# Altium PCB PMP30528_RevA.PcbDoc (part 3 of 3)
Units mil, origin at the board's own origin, x right, y up, seen from the top; angles counter-clockwise.
Board outline 2735.03 x 1328.78 mil, 2 copper layers (Top Layer, Bottom Layer), stack 62 mil thick; 91 components, 42 nets, 252 pads, 63 vias.
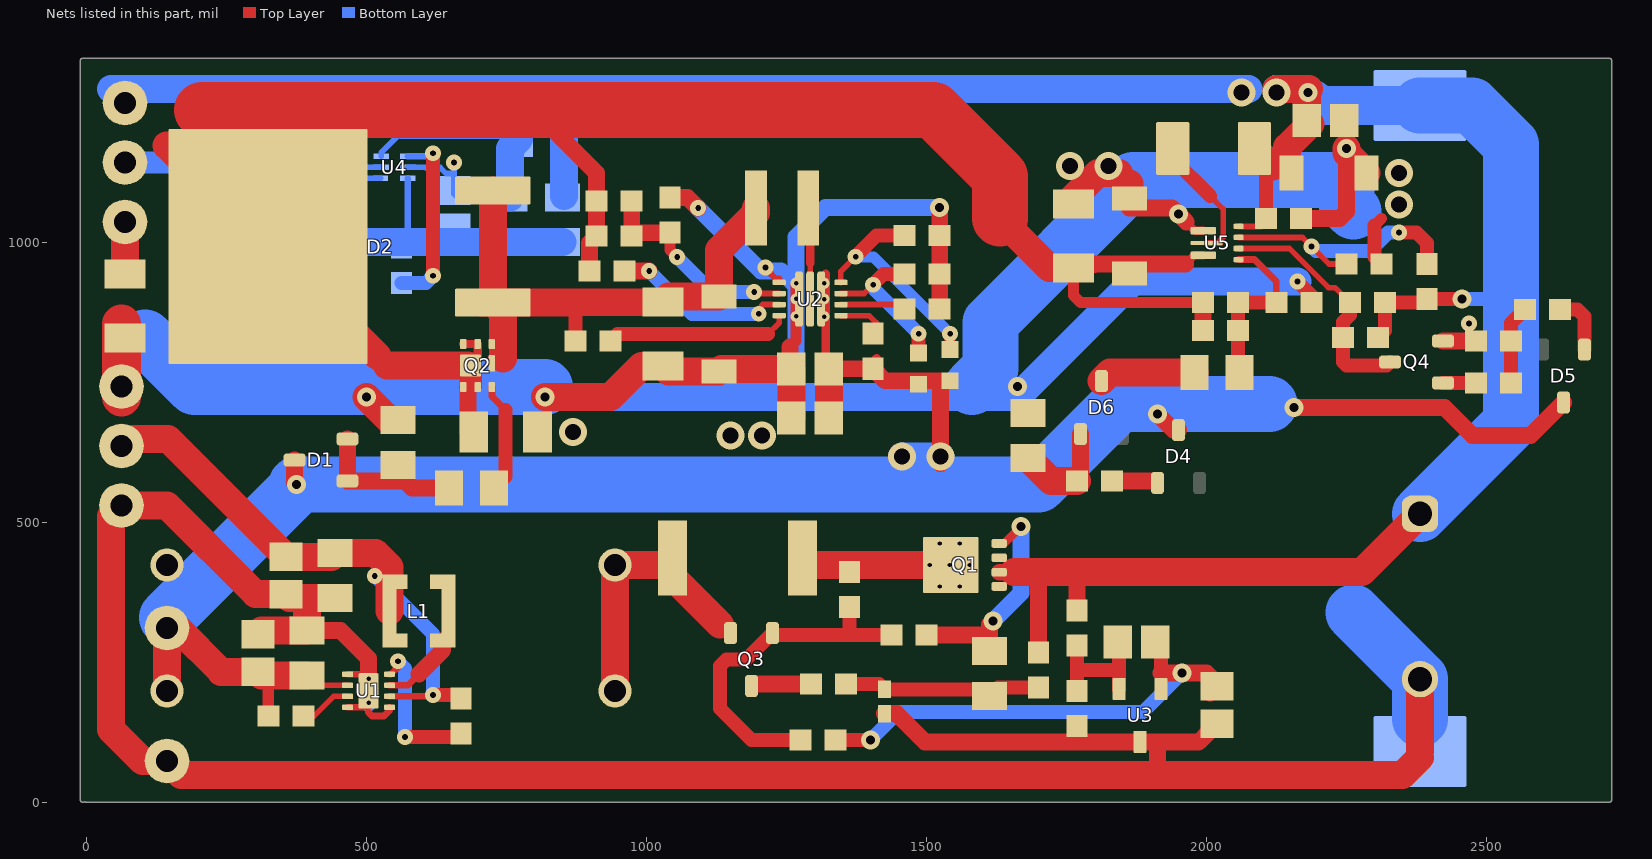
[diagram p2: the nets of this part, all layers, seen from the top]

## Via types
v1: diameter 28, hole 10, Top Layer to Bottom Layer, 21 vias
v2: diameter 34, hole 16, Top Layer to Bottom Layer, 16 vias
v3: diameter 50, hole 28, Top Layer to Bottom Layer, 11 vias
v4: diameter 19.68, hole 7.87, Top Layer to Bottom Layer, 9 vias
v5: diameter 20, hole 8, Top Layer to Bottom Layer, 6 vias

## Nets (pads, with @x,y where several pads share a name; then routed paths per layer and width w, separated by ;. In a path a pad name is that pad's centre, name@x,y a point inside that pad or via, vN(x,y) a via of type N, cw(c..) or ccw(c..) an arc to the next point about the centre after c; other vN are vias at no path point)
3.3Vout: C5.1 C12.1 C13.1 C23.1 C24.1 C25.1 D2.4 Q2.1 Q2.2 Q2.5 Q2.6 Q2.8 R14.2 R18.2 R34.2 TP6.1 U5.3@1994.14,978.35 | length 3830.9
  Top Layer w15: Q2.1@672.75,742.8 681.41,742.8 ; Q2.6@672.75,819.57 Q2.5@698.34,819.57 Q2.2@698.34,742.8 ; 1962.5,962.5 1978.35,978.35 U5.3@1994.14,978.35
  Top Layer w20: C25.1@1762.5,955.41 1762.5,906.25 1775,893.75 R34.2@1993.5,893.75
  Top Layer w30: 525.74,1234.79 843.75,1234.79 ; C12.1@681.41,662.43 681.41,742.8 Q2.8@681.41,781.18 ; 842.09,1193.68 910.59,1125.18 R18.2@910.59,1074.93 C5.1@910.59,1012.43 ; R14.2@898.09,949.93 C5.1@898.09,999.93 ; 1800,961.66 1800.84,962.5 1962.5,962.5 ; C23.1@1993.5,843.75 R34.2@1993.5,893.75
  Top Layer w50: C13.1@68.75,944.59 TP6.1@68.75,1037.5 ; 143.25,1174.5 D2.4@324.07,993.68 519.65,798.11 ; 536.57,781.18 Q2.8@681.41,781.18 ; 1631.25,1043.75 1719.59,955.41 C25.1@1762.5,955.41
  Top Layer w100: 206.25,1237.5 1512.5,1237.5 1631.25,1118.75 1631.25,1043.75
EN_U3: Q4.3 R29.1 R32.2 U5.5 | length 439.5
  Top Layer w10: U5.5@2057.14,990.16 2147.93,990.16 2217.79,920.3 2229.45,920.3 R32.2@2256,893.75
  Top Layer w25: R32.2@2256,893.75 2256,871.21 2243.5,858.71 R29.1@2243.5,831.25 2243.5,787.75 2250,781.25 2321.51,781.25 Q4.3@2327.76,787.5
FB1: C5.2 R18.1 R23.2 U2.5 | length 391.5
  Top Layer w10: v1@1194.74,909.77 U2.5@1236.97,909.77
  Top Layer w12: v1(1192.09,912.43) v1@1194.74,909.77
  Top Layer w20: R23.2@1042.09,1018.44 1042.09,987.43 v1(1054.59,974.93)
  Top Layer w30: R18.1@973.58,1074.93 C5.2@973.58,1012.43 979.59,1018.44 R23.2@1042.09,1018.44
  Bottom Layer w25: v1(1054.59,974.93) 1117.09,912.43 v1(1192.09,912.43)
GND: BT1.1 C1.2 C2.2 C3.2 C4.2 C7.2 C8.2 C9.2 C10.2 C11.2 C12.2 C13.2 C14.2 C15.2 C16.2 C17.2 C18.2 C19.2 C20.2 C21.2 C22.2 C24.2 C25.2 D3.2 Q4.2 R7.1 R21.1 R22.1 R23.1 R24.1 R27.1 R28.2 R36.1 R37.1 R38.1 TP3.1 TP4.1 TP7.1 U1.1 U1.4 U1.5 U1.9@503.75,200.32 U2.3@1272.4,899.93 U2.4 U3.3 U4.6 U5.1@1994.14,1021.65 | length 11186.3
  Top Layer w12: U1.4@466.35,170.79 U1.9@503.28,170.79 ; U1.1@466.35,229.84 495.88,229.84 v4(503.75,221.97) ; 503.28,161.95 509.91,155.32 531.25,155.32 541.15,165.22 U1.5@541.15,170.79 ; v1@1217.09,949.93 1230.87,936.15 1236.97,936.15 ; 1256.46,814.3 1267.09,824.93
  Top Layer w15: 1963.91,1037.5 1979.75,1021.65 U5.1@1994.14,1021.65
  Top Layer w20: 1267.09,824.93 U2.3@1267.09,924.93 ; 2300,1031.25 2312.5,1043.75
  Top Layer w25: v1(2162.5,931.25) 2187.75,906 R38.1@2187.75,893.75 ; 2300,1031.25 2300,975.25 R37.1@2312.75,962.5
  Top Layer w30: C4.2@393.75,307.82 453.75,307.82 503.75,257.82 v4(503.75,221.97) ; R23.1@1042.09,1081.43 1073.09,1081.43 v1(1092.09,1062.43) ; 1256.46,814.3 1256.46,777.1 C8.2@1258.62,774.93 ; D3.2@1425,159.6 1446.65,159.6 1497.24,109.01 U3.3@1881.25,109.01 1912.5,109.01 ; v2(1523.34,1063.17) 1523.58,1062.92 C15.2@1523.58,881.92 ; C24.2@1862.5,1062.5 1938.91,1062.5 1963.91,1037.5 ; 1912.5,50 1912.5,109.01 ; C14.2@2006.25,129.04 1986.22,109.01 1912.5,109.01 ; C22.2@2169,1043.75 2237.5,1043.75 2250,1056.25 v2@2250,1160.68 ; v2(2250,1168.75) 2250,1210.29 C19.2@2252.21,1212.5 ; Q4.2@2422.24,824.9 R36.1@2480.91,824.9
  Top Layer w50: C3.2@312.79,307.82 C4.2@393.75,307.82 393.75,364.38 ; C2.2@356.25,372.79 302.21,372.79 143.75,531.25 TP4.1@62.5,531.25 43.75,512.5 43.75,131.25 100,75 TP3.1@143.75,75 168.75,50 1912.5,50 2350,50 2381.25,81.25 ; C2.2@362.79,366.25 C1.2@443.75,366.25 ; v2(500,725) 541.25,683.75 R7.1@556.25,683.75 ; v2(818.75,725) 935.91,725 991.25,780.34 C10.2@1029.59,780.34 ; C10.2@1039.43,770.5 C9.2@1129.59,770.5 1134.02,774.93 C8.2@1258.62,774.93 C7.2@1258.62,687.43 ; C25.2@1762.5,1069.59 1762.5,1081.25 1806.25,1125 v3@1843.75,1125 ; C24.2@1862.5,1079.43 1862.5,1106.25 ; v2(2250,1168.75) 2250,1160.68 C20.2@2285.68,1125 ; 2381.25,91.98 v2(2381.25,221.11)
  Top Layer w70: TP7.1@62.5,725 C13.2@62.5,855.41
  Bottom Layer w12: U4.6@573.62,1115.6 573.62,1002.91 R28.2@575,1001.54
  Bottom Layer w30: v4(503.75,178.66) v4(503.75,221.97) ; v1(1092.09,1062.43) 1204.59,949.93 1217.09,949.93 1240.49,949.93 v5@1267.09,923.34 ; 1267.09,744.64 v5@1267.09,923.34 ; v2(1523.34,1063.17) 1319.42,1063.17 1267.09,1010.84 v5(1267.09,928.06) v5@1267.09,923.34
  Bottom Layer w50: C18.2@456.25,1001.54 575,1001.54 C17.2@756.25,1001.54 C16.2@850,1001.54 ; v2(818.75,725) 1662.5,725 1868.75,931.25 v1(2162.5,931.25) ; BT1.1@2381.25,91.98 BT1.1@2381.25,150
  Bottom Layer w70: 62.5,831.25 104.46,831.25
  Bottom Layer w100: 104.46,831.25 192.73,742.98 818.75,742.98 ; 1581.25,742.98 1613.96,775.69 1613.96,857.71 1868.75,1112.5 2250,1112.5 2250,1068.75 2262.5,1056.25 ; 2262.5,339.86 v2(2381.25,221.11) BT1.1@2381.25,150
  other v1: 2468.75,856.25 1212.5,956.25
  other v2: 1662.5,743.75 1950,1051.41
  other v3: 1150,656.25 1206.25,656.25 868.75,662.5 2343.75,1068.75 2343.75,1125 1756.25,1137.5 1825,1137.5
  other v5: 1267.09,868.75 1267.09,900
NetC1_1: C1.1 C2.1 L1.2 R2.2 TP2.1 U1.6 | length 1029.5
  Top Layer w12: U1.6@541.15,190.47 616.41,190.47 v1(618.75,192.82)
  Top Layer w25: v1(618.75,192.82) R2.2@662.75,192.82
  Top Layer w50: TP2.1@64.25,650 TP2.1@76.75,637.5 ; TP2.1@76.75,650 145.96,650 C2.1@356.25,439.71 C1.1@437.21,439.71 ; C1.1@443.75,446.25 516.25,446.25 541.19,421.31 L1.2@541.19,342.82
  Bottom Layer w25: v1(515.01,405.32) 618.75,301.57 v1(618.75,192.82)
NetC6_1: C6.1 R12.1 R24.2 U3.2 | length 237.5
  Top Layer w25: R24.2@1768.75,200.25 1768.75,237.5 ; R12.1@1768.75,281 1768.75,237.5 ; U3.2@1843.85,203.49 1843.85,237.5 ; C6.1@1843.85,285.19 1843.85,237.5 ; 1768.75,237.5 1843.85,237.5
NetC6_2: C6.2 C14.1 R15.1 U3.1 | length 833.5
  Top Layer w25: R15.1@1337.75,112.5 v2(1400,112.5) ; 1918.65,232.04 C6.2@1918.65,277.31
  Top Layer w30: 1918.65,232.04 v2(1956.25,232.04) 2000.34,232.04 2006.25,226.13 C14.1@2006.25,195.96
  Bottom Layer w25: v2(1400,112.5) 1450,162.5 1886.71,162.5 v2(1956.25,232.04)
NetC9_1: C9.1 C10.1 D2.1 D2.3 L2.2 Q2.4 Q2.7 R20.2 | length 988.9
  Top Layer w15: Q2.7@723.93,784.92 Q2.7@723.93,793.75
  Top Layer w25: 867.09,894.52 873.09,888.51 R20.2@873.09,824.93
  Top Layer w50: D2.1@704.59,893.68 D2.1@725.65,893.68 ; D2.3@725.65,1093.68 D2.1@725.65,893.68 ; 743.75,793.75 743.75,875.58 D2.1@725.65,893.68 D2.1@725.65,893.68 ; C10.1@1029.59,894.52 867.5,894.1 D2.1@725.65,893.68 ; C10.1@1039.43,904.36 C9.1@1129.59,904.36 1129.59,987.43 1195.59,1053.43 L2.2@1195.59,1062.43
NetC15_1: C15.1 U2.9 | length 105.2
  Top Layer w10: U2.9@1347.2,890.09 C15.1@1452.42,890.09
NetC17_1: C17.1 R26.2 U4.3 | length 383.4
  Bottom Layer w10: U4.3@526.38,1154.97 526.38,1161.66 562.5,1197.79
  Bottom Layer w25: 562.5,1197.79 760,1197.79 R26.2@772.5,1185.29
  Bottom Layer w50: C17.1@756.25,1081.54 756.25,1169.04 R26.2@772.5,1185.29
NetC18_1: C18.1 TP8.1 U4.1 | length 502.6
  Bottom Layer w10: C18.1@456.25,1081.54 456.25,1091.54 480.32,1115.6 U4.1@525.59,1115.6
  Bottom Layer w40: TP8.1@68.75,1143.75 350,1143.75 412.21,1081.54 C18.1@456.25,1081.54
NetC21_1: C21.1 U4.5 | length 160.2
  Bottom Layer w10: U4.5@573.62,1135.29 605.74,1135.29 607.62,1133.41 629.88,1133.41 631.38,1134.91 642.12,1124.16 654.87,1124.16 656.25,1122.79 C21.1@656.25,1093.75 656.25,1087.5 C21.1@668.75,1075 ; 656.25,1125.54 v1(656.25,1143.75)
NetC23_2: C23.2 R31.2 R34.1 R38.2 U5.4 | length 312.4
  Top Layer w12: U5.4@2057.14,970.47 2085.53,970.47 2124.75,931.25 R38.2@2124.75,893.75
  Top Layer w25: R31.2@2056.5,771 C23.2@2056.5,843.75 2056.5,893.75 R38.2@2124.75,893.75
NetD1_1: D1.1 D1.2 R4.1 R7.2 | length 261.5
  Top Layer w30: D1.2@465.99,649.9 D1.1@465.99,575.1 568.65,575.1 581.25,562.5 R4.1@647.5,562.5
NetD3_1: D3.1 R9.1 R11.1 R19.2 | length 344.8
  Top Layer w25: R19.2@1356.5,212.5 D3.1@1415.4,212.5 ; D3.1@1425,202.9 1600.85,202.9 R11.1@1612.5,191.25 1627.25,206 R9.1@1700,206
NetD4_1: D4.1 R25.2 | length 77.6
  Top Layer w30: R25.2@1831.5,575 D4.1@1909.1,575
NetD5_1: D5.1 R33.2 | length 107.6
  Top Layer w25: R33.2@2631.5,881.25 2662.5,881.25 2674.9,868.85 D5.1@2674.9,809.74
NetD6_1: D6.1 R25.1 R27.2 | length 191.1
  Top Layer w30: R25.1@1768.5,575 1775.1,581.59 D6.1@1775.1,659.01
  Top Layer w50: R27.2@1681.25,616.25 1722.5,575 R25.1@1768.5,575
NetD6_3: D6.3 R31.1 | length 172.6
  Top Layer w50: D6.3@1812.5,753.49 1827.76,768.75 R31.1@1978.75,768.75
NetL1_1: L1.1 U1.7 | length 138.7
  Top Layer w12: U1.7@541.15,210.16 573.59,210.16 593.75,230.32
  Top Layer w30: 593.75,230.32 636.27,272.83 L1.1@636.27,290.45
NetL2_1: L2.1 U2.2@1292.09,899.93 | length 159
  Top Layer w10: U2.2@1292.09,899.93 1292.09,963.59
  Top Layer w15: 1292.09,963.59 L2.1@1292.09,1058.93
NetL3_2: L3.2 U4.2 | length 110.8
  Bottom Layer w10: L3.2@425,1158.07 452.21,1158.07 475,1135.29 U4.2@526.38,1135.29
NetL4_2: L4.2 U5.2@2000.05,1000 | length 232.9
  Top Layer w10: U5.2@2000.05,1000 2025,1000 2025,1005.95 2029.66,1010.6 2029.66,1060.91 2006.65,1083.91
  Top Layer w25: L4.2@1939.67,1168.75 1939.67,1150.9 2006.65,1083.91
NetQ1_4: Q1.4 R10.1 R11.2 | length 403.4
  Top Layer w15: Q1.4@1629.77,463.39 1638.39,463.39 v2(1668.75,493.75)
  Top Layer w30: R10.1@1500.25,300 1606.25,300 ; R11.2@1612.5,271.25 1612.5,318.75 v2(1618.75,325)
  Bottom Layer w30: v2(1618.75,325) 1668.75,375 v2(1668.75,493.75)
NetQ1_5: Q1.5 Q1.6 Q1.7 Q1.8 Q1.9@1543.36,425 R6.2 R8.2 | length 246
  Top Layer w50: R6.2@1278.64,425 Q1.9@1524.61,425
  other v4: 1523.47,386.61 1559.1,386.61 1505.66,425 1541.29,425 1576.92,425 1523.47,463.39 1559.1,463.39
NetQ2_3: Q2.3 R4.2 | length 199
  Top Layer w12: Q2.3@723.93,742.8 723.93,726.21 748.34,701.8
  Top Layer w25: R4.2@727.5,562.5 748.34,583.34 748.34,701.8
NetQ3_1: Q3.1 R8.1 R10.2 R15.2 | length 624.2
  Top Layer w25: R15.2@1274.75,112.5 1187.5,112.5 1131.25,168.75 1131.25,244.57 1142.93,256.25 1177.66,256.25 Q3.1@1224.9,303.49 1228.4,300 1362.5,300 ; R8.1@1362.5,349.75 1362.5,300 ; R10.2@1437.25,300 1362.5,300
NetQ3_2: Q3.2 R3.2 R5.2 R6.1 | length 469
  Top Layer w50: R5.2@943.75,200 R3.2@943.75,425 1046.36,425 1046.36,403.64 1131.25,318.75
NetQ3_3: Q3.3 R19.1 | length 102.5
  Top Layer w30: Q3.3@1190.99,212.5 R19.1@1293.5,212.5
NetQ4_1: Q4.1 R35.1 | length 58.7
  Top Layer w25: Q4.1@2422.24,750.1 R35.1@2480.91,750.1
NetR1_2: R1.2 U1.3 | length 93.2
  Top Layer w10: R1.2@387.75,155.32 406.25,155.32 441.41,190.47 U1.3@466.35,190.47
NetR2_1: R2.1 U1.8 | length 267.3
  Top Layer w12: U1.8@541.15,229.84 543.28,229.84 556.25,242.82 v1(556.25,252.98) v1@556.25,255.32
  Top Layer w25: v1(568.75,117.82) R2.1@662.75,117.82
  Bottom Layer w25: v1(556.25,252.98) 568.75,240.48 v1(568.75,117.82)
NetR13_2: R13.2 U2.8 | length 69.1
  Top Layer w10: U2.8@1347.2,870.4 1397.6,870.4 R13.2@1410.84,857.17
NetR14_1: R14.1 U2.6 | length 304.3
  Top Layer w10: 1204.59,887.43 1207.24,890.09 U2.6@1236.97,890.09
  Top Layer w30: R14.1@961.08,949.93 v1(1004.59,949.93)
  Bottom Layer w25: v1(1004.59,949.93) 1080.96,873.56 v1(1200.28,873.56)
NetR16_1: R16.1 R22.2 U2.10 | length 283.4
  Top Layer w10: U2.10@1347.2,909.77 1388.69,909.77 v1(1404.59,925.67)
  Top Layer w25: v1(1404.59,925.67) 1423.34,944.42 R22.2@1460.59,944.42 ; R16.1@1485.84,803.67 v1(1485.84,838.17)
  Bottom Layer w25: v1(1404.59,925.67) 1404.59,919.42 v1(1485.84,838.17)
NetR17_1: R17.1 R21.2 U2.11 | length 413.8
  Top Layer w10: U2.11@1347.2,929.46 1347.2,949.54 v1(1373.34,975.67)
  Top Layer w20: R17.1@1542.09,809.92 v1(1542.09,838.17)
  Top Layer w25: v1(1373.34,975.67) 1410.84,1013.17 R21.2@1460.59,1013.17
  Bottom Layer w20: v1(1373.34,975.67) 1374.01,975 1405.26,975 v1(1542.09,838.17)
NetR20_1: R20.1 U2.7 | length 327.4
  Top Layer w10: 1217.09,837.43 1236.97,857.31 U2.7@1236.97,870.4
  Top Layer w25: R20.1@936.08,824.93 948.58,837.43 1217.09,837.43
NetR28_1: R28.1 U4.4 | length 321.4
  Top Layer w25: v1(618.75,941.54) v1(618.75,1160.29)
  Bottom Layer w12: U4.4@573.62,1154.97 607.18,1154.97 v1@612.5,1160.29
  Bottom Layer w25: R28.1@562.5,928.79 606,928.79 v1(618.75,941.54)
NetR30_1: R30.1 R37.2 U5.6 | length 480.4
  Top Layer w10: U5.6@2057.14,1009.84 2171.41,1009.84 v1(2187.5,993.75) 2218.75,962.5 R37.2@2249.75,962.5
  Top Layer w25: v1(2343.75,1018.75) 2375,1018.75 2393.75,1000 R30.1@2393.75,962.75
  Bottom Layer w25: v1(2187.5,993.75) 2195.37,985.88 2291.65,985.88 2324.52,1018.75 v1(2343.75,1018.75)
NetR33_1: R33.1 R35.2 R36.2 | length 141.4
  Top Layer w25: R35.2@2544,750 R36.2@2544,825 2544,856.74 R33.1@2568.5,881.25
V_backup: BT1.2 C11.1 C16.1 C19.1 C20.1 C22.1 L3.1 L4.1 Q1.1 Q1.2 Q1.3 R9.2 R12.2 R26.1 R29.2 R30.2 R32.1 TP5.1 U5.7 | length 5518.2
  Top Layer w10: U5.7@2057.14,1029.53 2098.28,1029.53 C22.1@2114.32,1045.57
  Top Layer w25: C22.1@2106,1043.75 L4.1@2106,1148.08 ; R29.2@2306.5,831.25 2319,843.75 R32.1@2319,893.75 2387.75,893.75 R30.2@2393.75,899.75 2456,899.75 v2(2456.25,900)
  Top Layer w30: Q1.2@1629.77,412.2 1655.95,412.2 ; 1693.75,412.5 1700,406.25 R9.2@1700,269 ; R12.2@1768.75,344 1768.75,412.5
  Top Layer w50: 1655.95,412.2 1656.25,412.5 1693.75,412.5 1768.75,412.5 2277.36,412.5 C11.1@2381.25,516.39 ; L4.1@2085.33,1168.75 2106,1148.08 2117.67,1136.42 ; v3@2125,1275 v2@2183.16,1275 ; 2143.75,1162.5 2143.75,1170.96 C19.1@2185.29,1212.5 ; C19.1@2179.04,1218.75 v2@2179.04,1266.54
  Bottom Layer w25: L3.1@425,1225 425,1238.43 440.6,1254.04 837.5,1254.04 852.5,1239.04 852.5,1225.29 ; R26.1@852.5,1185.29 R26.1@852.5,1204.04 ; v2(2456.25,900) 2543.75,900
  Bottom Layer w50: TP5.1@43.75,1275 v3@2075,1275 ; C16.1@852.5,1084.04 R26.1@852.5,1185.29 ; R26.1@852.5,1204.04 852.5,1225.29 ; 852.5,1239.04 867.5,1254.04 ; v3@2125,1275 v2@2175,1275
  Bottom Layer w70: v2@2187.5,1258.12 2204.48,1245.52 BT1.2@2381.25,1245.52
  Bottom Layer w100: C11.1@2381.25,516.39 2543.75,678.89 2543.75,900 2543.75,1175.49 2473.72,1245.52 BT1.2@2381.25,1245.52
  other v2: 2181.25,1268.75
  other v3: 2062.5,1268.75 2125,1268.75
Vin: C3.1 C4.1 C7.1 C8.1 D1.3 D4.3 D5.3 R1.1 R3.1 R5.1 R13.1 R16.2 R17.2 TP1.1 U1.2 U2.1@1311.77,899.93 | length 3974.6
  Top Layer w10: C4.1@411.09,210.16 U1.2@466.35,210.16
  Top Layer w15: C8.1@1320.02,780.46 1320.02,945.13 ; C8.1@1325.06,775.42 C8.1@1325.55,774.93 ; R13.1@1392.09,775.42 R13.1@1410.84,794.17
  Top Layer w20: R1.1@324.75,155.32 C3.1@324.75,215.85
  Top Layer w30: D1.3@371.51,612.5 371.51,572.24 v2(375,568.75) ; C8.1@1320.02,780.46 1325.06,775.42 1392.09,775.42 R13.1@1404.59,775.42 1426.09,753.92 1523.39,753.92 ; v3@1525,606.25 v3(1525,618.75) 1525,752.31 ; v2(1912.5,694.54) 1941.04,665.99 D4.3@1950,665.99 ; v2(2156.25,706.25) 2425,706.25 2475,656.25 2578.49,656.25 D5.3@2637.5,715.26
  Top Layer w50: R5.1@143.75,200 TP1.1@143.75,312.5 162.5,312.5 240.65,234.35 C3.1@306.25,234.35 ; C3.1@312.79,227.82 C4.1@393.75,227.82 ; C7.1@1325.55,687.43 C8.1@1325.55,774.93
  Bottom Layer w30: v2(2156.25,706.25) v2@2168.75,706.25
  Bottom Layer w50: v3(1456.25,618.75) v3(1525,618.75)
  Bottom Layer w100: TP1.1@143.75,331.25 v2@378.12,565.62 ; v2@375,568.75 1456.25,568.65 1525,568.64 1699.87,568.62 1843.75,712.5 2112.5,712.5
  other v5: 1317.09,868.68 1317.09,899.93 1317.09,928.06
pads on no net: D4.2 D5.2 D6.2 Q1.9@1522.49,386.61 Q1.9@1522.49,412.2 Q1.9@1522.49,437.8 Q1.9@1522.49,463.39 Q1.9@1541.29,398.92 Q1.9@1541.29,451.08 Q1.9@1555.86,425 Q1.9@1576.92,398.92 Q1.9@1576.92,451.08 Q2.0 U1.9@503.75,182.6 U1.9@503.75,218.03 U2.1@1311.77,866.07 U2.1@1311.77,899.93 U2.1@1311.77,933.79 U2.2@1292.09,866.07 U2.2@1292.09,899.93 U2.2@1292.09,933.79 U2.3@1272.4,866.07 U2.3@1272.4,899.93 U2.3@1272.4,933.79 U5.1@1980.86,1021.65 U5.1@2007.43,1021.65 U5.2@1983.81,1000 U5.2@2016.29,1000 U5.3@1980.86,978.35 U5.3@2007.43,978.35

## Polygon pours and split planes (outlines as drawn)
V_backup on Top Layer "TOP_LAYER_V_BACKUP_P014" (solid, remove dead copper, pour order 14): 2200,1300 2056.25,1300 2056.25,1030.41 2057.14,1029.53 2125,1029.53 2125,1062.5 2168.75,1106.25 2168.75,1093.75 2200,1125
GND on Top Layer "TOP_LAYER_GND_P012" (solid, remove dead copper, pour order 12): 2231.25,1287.5 2225,1281.25 2225,1081.25 2206.2,1062.45 2156.25,1062.45 2156.25,1025.05 2156.3,1025 2312.5,1025 2331.25,1043.75 2331.25,1275 2318.75,1287.5
NetQ3_2 on Top Layer "TOP_LAYER_NETQ3_2_P016" (solid, remove dead copper, pour order 16): 1125,518.75 1137.5,506.25 1137.5,318.9 1118.6,300 1118.21,300.39 761.71,300.39 737.5,324.61 737.5,500 756.25,518.75
NetQ1_5 on Top Layer "TOP_LAYER_NETQ1_5_P018" (solid, remove dead copper, pour order 18): 1181.25,487.5 1212.5,518.75 1581.25,518.75 1593.75,506.25 1593.75,362.5 1587.5,356.25 1462.5,356.25 1431.25,387.5 1181.25,387.5
V_backup on Top Layer "TOP_LAYER_V_BACKUP_P020" (solid, remove dead copper, pour order 20): 1629.77,437.8 cw(c1635.73,437.8) 1635.73,443.75 1981.25,443.75 2118.75,568.75 2131.25,568.75 2462.5,568.75 2481.25,550 2481.25,356.25 2462.5,337.5 1664.8,337.5 1627.3,375 1627.3,418.75
GND on Top Layer "TOP_LAYER_GND_P026" (solid, remove dead copper, pour order 26): 18.75,43.75 ccw(c50,43.75) 50,12.5 2668.75,12.5 ccw(c2668.75,43.75) 2700,43.75 2700,1268.75 ccw(c2668.75,1268.75) 2668.75,1300 37.5,1300 ccw(c37.5,1281.25) 18.75,1281.25
Vin on Top Layer "TOP_LAYER_VIN_P004" (solid, remove dead copper, pour order 4): 1300,762.5 1547.77,762.5 cw(c1547.77,760.27) 1550,760.27 cw(c1550,745.31) 1564.96,745.31 1564.96,627.46 cw(c1531.25,627.46) 1531.25,593.75 1318.75,593.75 cw(c1318.75,612.5) 1300,612.5
3.3Vout on Top Layer "TOP_LAYER_3.3VOUT_P010" (solid, remove dead copper, pour order 10): 701.09,637.5 700,638.59 700,837.5 ccw(c687.5,837.5) 687.5,850 500,850 cw(c500,856.25) 493.75,856.25 493.75,793.75 675,637.5
3.3Vout on Top Layer "TOP_LAYER_3.3VOUT_P006" (solid, remove dead copper, pour order 6): 18.75,1262.5 cw(c43.75,1262.5) 43.75,1287.5 581.25,1287.5 cw(c581.25,1256.25) 612.5,1256.25 612.5,818.75 cw(c581.25,818.75) 581.25,787.5 311.16,787.5 cw(c311.16,887.5) 211.16,887.5 211.16,992.68 56.74,992.68 cw(c75.78,1049.71) 18.75,1068.75
NetC9_1 on Top Layer "TOP_LAYER_NETC9_1_P028" (solid, remove dead copper, pour order 28): 650,1137.5 650,881.25 ccw(c662.5,881.25) 662.5,868.75 818.46,868.75 ccw(c818.46,894.04) 843.75,894.04 843.75,1118.75 ccw(c812.5,1118.75) 812.5,1150 662.5,1150 ccw(c662.5,1137.5)
Vin on Bottom Layer "BOTTOM_LAYER_VIN_P022" (solid, remove dead copper, pour order 22): 1300,956.25 1343.75,956.25 1350,950 1350,825 1339.3,814.3 1304.45,814.3 1293.75,825 1293.75,950
GND on Bottom Layer "BOTTOM_LAYER_GND_P024" (solid, remove dead copper, pour order 24): 37.5,6.25 cw(c37.5,37.5) 6.25,37.5 6.25,1275 cw(c31.25,1275) 31.25,1300 2662.5,1300 cw(c2662.5,1262.5) 2700,1262.5 2700,50 cw(c2656.25,50) 2656.25,6.25
NetQ1_5 on Bottom Layer "BOTTOM_LAYER_NETQ1_5_P000" (solid, remove dead copper, pour order 0): 1400,487.5 cw(c1418.75,487.5) 1418.75,506.25 1625,506.25 cw(c1625,493.75) 1637.5,493.75 1637.5,387.5 cw(c1618.75,387.5) 1618.75,368.75 1418.75,368.75 cw(c1418.75,387.5) 1400,387.5
V_backup on Bottom Layer "BOTTOM_LAYER_V_BACKUP_P008" (solid, remove dead copper, pour order 8): 2025,1300 2025,1262.5 ccw(c2103.12,1278.12) 2118.75,1200 2589.62,1200 ccw(c2589.62,1204.68) 2594.3,1204.68 2594.3,1274.45 ccw(c2568.75,1274.45) 2568.75,1300

## Keep-outs
Keep-Out Layer:
  text ".Layer_Name" at 577,-858.49 h60

## Other copper
Top Layer:
  text ".Layer_Name" at 577,-858.49 h60
Bottom Layer:
  text ".Layer_Name" at 577,-858.49 h60

## Silkscreen, mask and mechanical layers (free items; w line width, h text height)
Top Overlay:
  lines w10: 2175,800 2175,831.25 2206.25,862.5 2206.25,831.25 2206.25,850 2200,856.25
  text "PMP30528_RevA" at 681.25,1237.5 h100
  text ".Layer_Name" at 577,-858.49 h30
Bottom Overlay:
  text ".Layer_Name" at 577,-858.49 h60
Top Paste:
  text ".Layer_Name" at 577,-858.49 h60
Bottom Paste:
  text ".Layer_Name" at 577,-858.49 h60
Top Solder:
  text ".Layer_Name" at 577,-858.49 h60
  text ".Layer_Name" at 577,-858.49 h60
Bottom Solder:
  text ".Layer_Name" at 577,-858.49 h60
Drill Guide:
  text ".Layer_Name" at 577,-858.49 h60
M1 Board Outline:
  lines w10: -6.25,6.25 -6.25,1325 2718.75,1325 2718.75,6.25 0,6.25
  text ".Layer_Name" at 577,-858.49 h60
M2 Board Dimensions:
  rectangle: 125,-400 500,-275
  rectangle: 0,-275 125,-150
  lines w7: 0,-275 1000,-275 ; 125,-400 125,-150 ; 250,-400 250,-150 ; 500,-400 500,-150 ; 750,-400 750,-150 ; 0,-400 0,-150 1000,-150 1000,-400 0,-400
  text ".Layer_Name" at 577,-858.49 h60
M3 3D STEP Top:
  text ".Layer_Name" at 577,-858.49 h60
M4 3D STEP Bottom:
  text ".Layer_Name" at 577,-858.49 h60
M5 Assembly Top:
  lines w10: -292,-930.17 6308,-930.17 ; -292,-726.83 6310,-726.83 ; -292,-523.5 -292,-1133.5 3713,-1133.5 6310,-1133.5 6310,-523.5 -291.5,-523.5 -291.5,-1133.5 1284,-1133.5 ; 2173,-1133.5 2173,-523.5 ; 3440,-726.83 3440,-523.5 ; 4280,-726.83 4280,-523.5 ; 4902,-1140 4902,-937.17
  text "COMPONENTS MARKED 'DNP' SHOULD NOT BE POPULATED." at 1153.5,-318.5 h60
  text "ASSEMBLY VARIANT:" at 1153,-434 h60
  text ".VariantName" at 2189,-434 h60
  text "PCB VIEWED FROM TOP SIDE" at -228.5,-655.67 h60
  text "BOARD #:" at 2248,-655.67 h60
  text ".PRJ_Number" at 2793.5,-655.67 h60
  text "REV:" at 3638,-655.67 h60
  text ".PCB_Rev" at 3929.5,-655.67 h60
  text "SVN REV:" at 4476,-655.67 h60
  text ".VersionControl_RevNumber" at 4982,-655.67 h60
  text "TID #:" at 2248,-859 h60
  text ".TID" at 2793.5,-859 h60
  text "PLOT NAME =" at -228.5,-1064.34 h60
  text ".plot_File_Name" at 577,-1064.34 h60
  text "GENERATED    :" at 2250,-1064.34 h60
  text ".Print_Date" at 3119.5,-1064.34 h60
  text ".Print_Time" at 3848.5,-1064.34 h60
  text "TEXAS INSTRUMENTS" at 5113,-1064.34 h60
M6 Assembly Bottom:
  lines w10: -292.5,-727.33 6309.5,-727.33 ; -290.5,-930.67 6309.5,-930.67 ; 1115.5,-1140.5 1115.5,-937.67 ; 1737.5,-727.33 1737.5,-524 ; 2577.5,-727.33 2577.5,-524 ; 3844.5,-1134 3844.5,-524 ; 4733.5,-1134 6309,-1134 6309,-524 -292.5,-524 -292.5,-1134 2304.5,-1134 6309.5,-1134 6309.5,-524
  text "COMPONENTS MARKED 'DNP' SHOULD NOT BE POPULATED." at 6102,-318 h60
  text ".VariantName" at 5058,-434 h60
  text "ASSEMBLY VARIANT:" at 6097,-434 h60
  text ".VersionControl_RevNumber" at 1035.5,-656.17 h60
  text "SVN REV:" at 1541.5,-656.17 h60
  text ".PCB_Rev" at 2088,-656.17 h60
  text "REV:" at 2379.5,-656.17 h60
  text ".PRJ_Number" at 3224,-656.17 h60
  text "BOARD #:" at 3769.5,-656.17 h60
  text "PCB VIEWED FROM BOTTOM SIDE" at 6246,-656.17 h60
  text ".TID" at 3224,-859.5 h60
  text "TID #:" at 3769.5,-859.5 h60
  text "TEXAS INSTRUMENTS" at 904.5,-1064.84 h60
  text ".Print_Time" at 2169,-1064.84 h60
  text ".Print_Date" at 2898,-1064.84 h60
  text "GENERATED    :" at 3767.5,-1064.84 h60
  text ".plot_File_Name" at 5440.5,-1064.84 h60
  text "PLOT NAME =" at 6246,-1064.84 h60
M9 Title Sheet:
  drawing of 57 lines, arcs and shapes, not listed
  text "1" at 739.84,8036.5 h70
  text "2" at 3235.5,8036.5 h70
  text "3" at 5724.84,8036.5 h70
  text "4" at 8231.51,8036.5 h70
  text "5" at 10730.5,8036.5 h70
  text "6" at 13235.5,8036.5 h70
  text "A" at -416.5,6893.5 h70
  text "A" at 14383.5,6893.5 h70
  text "B" at -416.5,4513.5 h70
  text "B" at 14383.5,4513.5 h70
  text "C" at -416.5,2138.5 h70
  text "C" at 14383.5,2138.5 h70
  text "PROJECT TITLE:" at 11343.5,277.5 h45
  text ".PRJ_Title" at 11393.5,144.17 h70
  text "DESIGNED FOR:" at 11343.5,-23.5 h45
  text ".PRJ_Customer" at 11393.5,-163.5 h70
  text "D" at -416.5,-231.5 h70
  text "D" at 14383.5,-231.5 h70
  text "FILE NAME:" at 11343.5,-323.5 h45
  text ".PCB_File_Name_No_Path" at 11393.5,-443.5 h70
  text "Texas Instruments (TI) and/or its licensors do not warrant the accuracy or completeness of this specification" at 6374,-605.34 h45
  text "ENGINEER:" at 11343.5,-613.5 h45
  text "LAYOUT BY:" at 12848.5,-613.5 h45
  text "or any information contained therein. TI and/or its licensors do not warrant that this design will meet" at 6329.01,-718 h45
  text ".PRJ_Engineer" at 11393.5,-768.49 h70
  text ".PCB_Layout" at 12899,-768.49 h70
  text "the specifications, will be suitable for your application or fit for any particular purpose, or will operate in" at 6329.01,-830.67 h45
  text ".Layer_Name" at 577,-858.49 h60
  text "ALTIUM DESIGNER VERSION:" at 12848.5,-923.5 h45
  text "an implementation. TI and/or its licensors do not warrant that the design is production worthy. You should" at 6329.01,-943.33 h45
  text "completely validate and test your design implementation to confirm the system functionality for your application." at 6374,-1056 h45
  text ".print_Scale" at 11393.5,-1056.83 h70
  text ".Application_BuildNumber" at 12899,-1056.83 h70
  text "1" at 739.84,-1263.5 h70
  text "2" at 3235.5,-1263.5 h70
  text "3" at 5724.84,-1263.5 h70
  text "4" at 8231.51,-1263.5 h70
  text "5" at 10730.5,-1263.5 h70
  text "6" at 13235.5,-1263.5 h70
M10 Fab Notes:
  lines w8: 11426.89,1051 11426.89,931 11546.89,931 11546.89,1051
  lines w20: 11304,871 14295,871 14295,6451.24
  text "LAYER 2 & 3 (INNER LAYERS) XX MIL WIDE, XX MIL SPACE / TRACES REQUIRE 100 OHM DIFFERENTIAL IMPEDANCE" at 11575.39,891.74 h60
  text ".Layer_Name" at 577,-858.49 h60
M11 Gerber Information:
  lines w10: -292,-930.17 6308,-930.17 ; -292,-726.83 6310,-726.83 ; -292,-523.5 -292,-1133.5 3713,-1133.5 6310,-1133.5 6310,-523.5 -291.5,-523.5 -291.5,-1133.5 1284,-1133.5 ; 2173,-1133.5 2173,-523.5 ; 3440,-726.83 3440,-523.5 ; 4280,-726.83 4280,-523.5 ; 4902,-1140 4902,-937.17
  text "ALL ARTWORK VIEWED FROM TOP SIDE" at -228.5,-655.67 h60
  text "BOARD #:" at 2248,-655.67 h60
  text ".PRJ_Number" at 2793.5,-655.67 h60
  text "REV:" at 3638,-655.67 h60
  text ".PCB_Rev" at 3929.5,-655.67 h60
  text "SVN REV:" at 4476,-655.67 h60
  text ".VersionControl_RevNumber" at 4982,-655.67 h60
  text "LAYER NAME =" at -228.5,-858.49 h60
  text "TID #:" at 2248,-859 h60
  text ".TID" at 2793.5,-859 h60
  text "PLOT NAME =" at -228.5,-1064.34 h60
  text ".plot_File_Name" at 577,-1064.34 h60
  text "GENERATED    :" at 2250,-1064.34 h60
  text ".Print_Date" at 3119.5,-1064.34 h60
  text ".Print_Time" at 3848.5,-1064.34 h60
  text "TEXAS INSTRUMENTS" at 5113,-1064.34 h60
M12 Stackup:
  text ".Layer_Name" at 577,-858.49 h60
M13 Component Bodies Top:
  text ".Layer_Name" at 577,-858.49 h60
M14 Component Bodies Bottom:
  text ".Layer_Name" at 577,-858.49 h60
M15 Courtyards Top:
  text ".Layer_Name" at 577,-858.49 h60
M16 Courtyards Bottom:
  text ".Layer_Name" at 577,-858.49 h60
Drill Drawing:
  text ".Layer_Name" at 577,-858.49 h60
M17 Embedded Cavity:
  text ".Layer_Name" at 577,-858.49 h60
M18 Embedded Assembly:
  text ".Layer_Name" at 577,-858.49 h60
M19 Embedded Keepout:
  text ".Layer_Name" at 577,-858.49 h60

## Dimensions
2723.76,6.25 to 0,0 on M2 Board Dimensions
0,0 to 2718.75,1330.01 on M2 Board Dimensions
0,-400 to 1000,-400 on M2 Board Dimensions

## Text inside footprints (layer, text, board x,y; h text height)
BT1: M6 Assembly Bottom "+" at 2538.73,58.51 h60 r270
C11: M5 Assembly Top "+" at 2361.57,734.89 h39.37 r270